# EAGLE board merge4 (EAGLE 6.6.0)
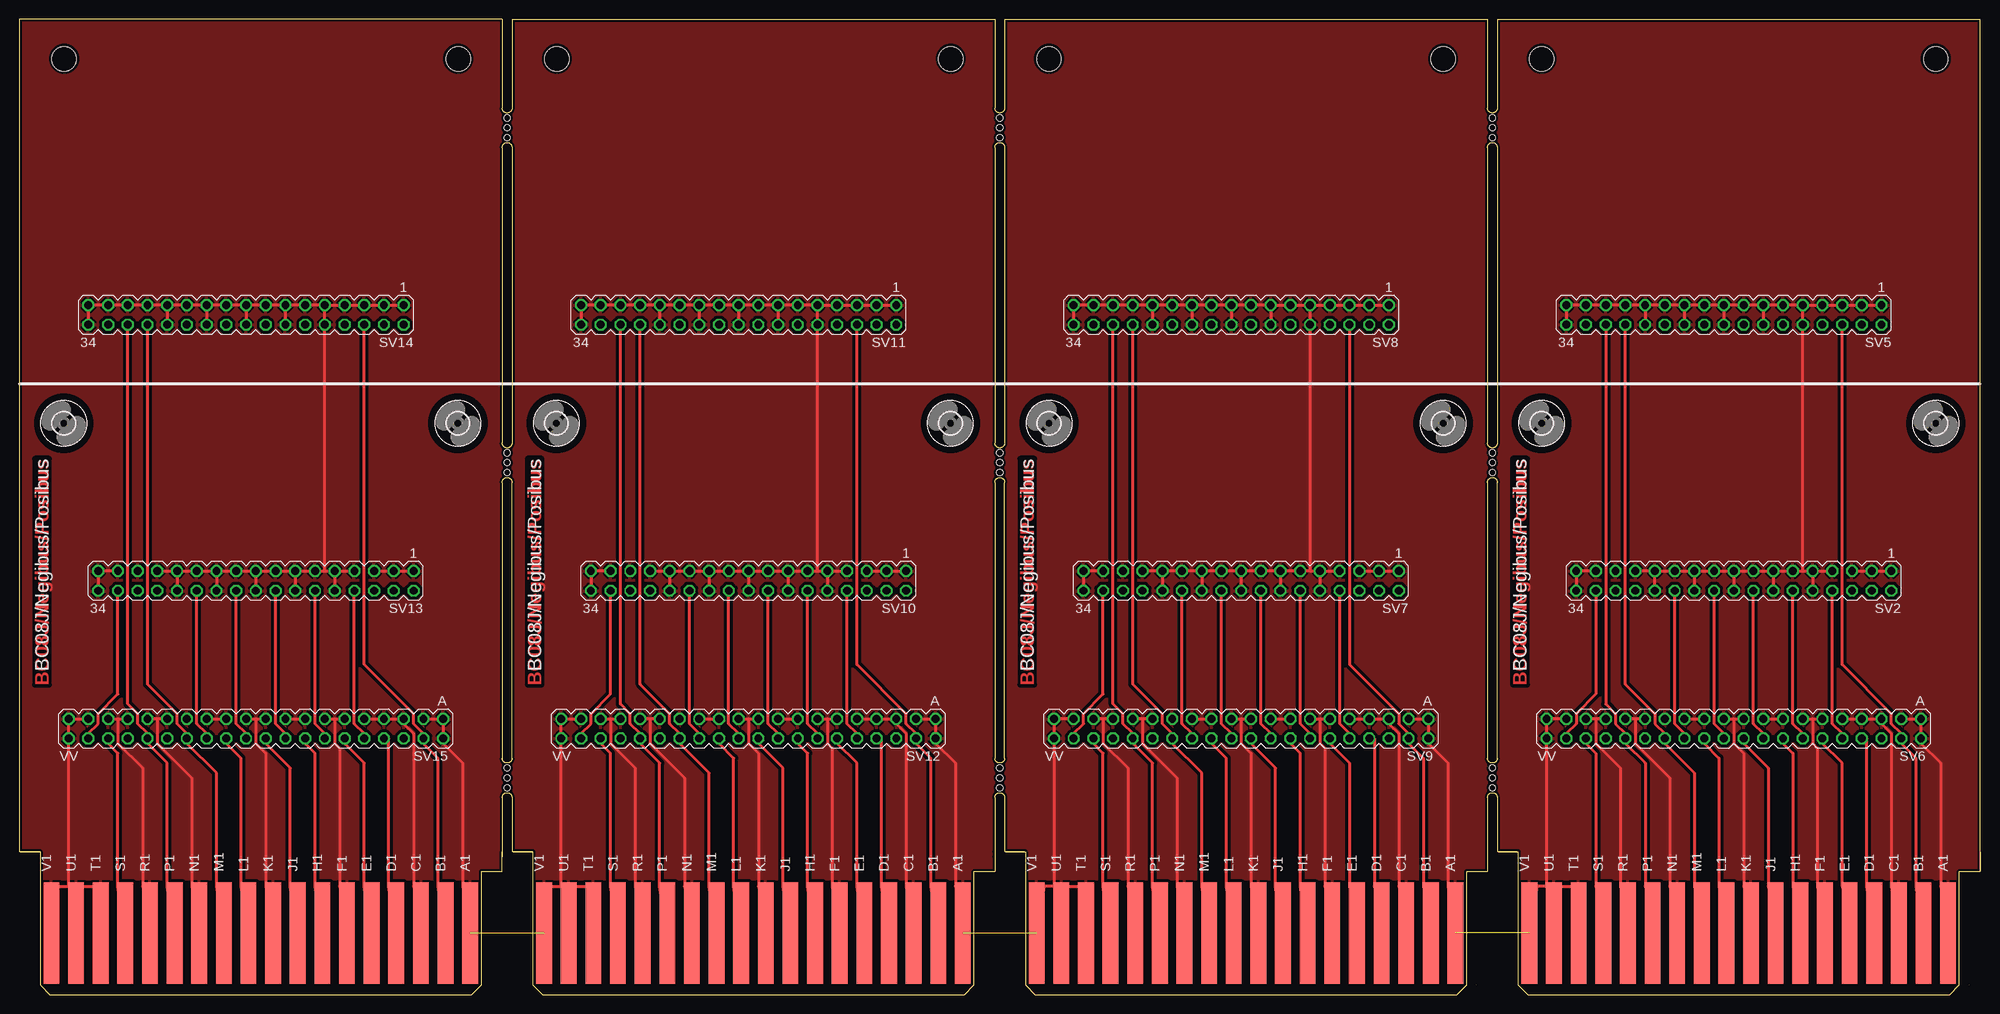
[diagram p0: board, top side]
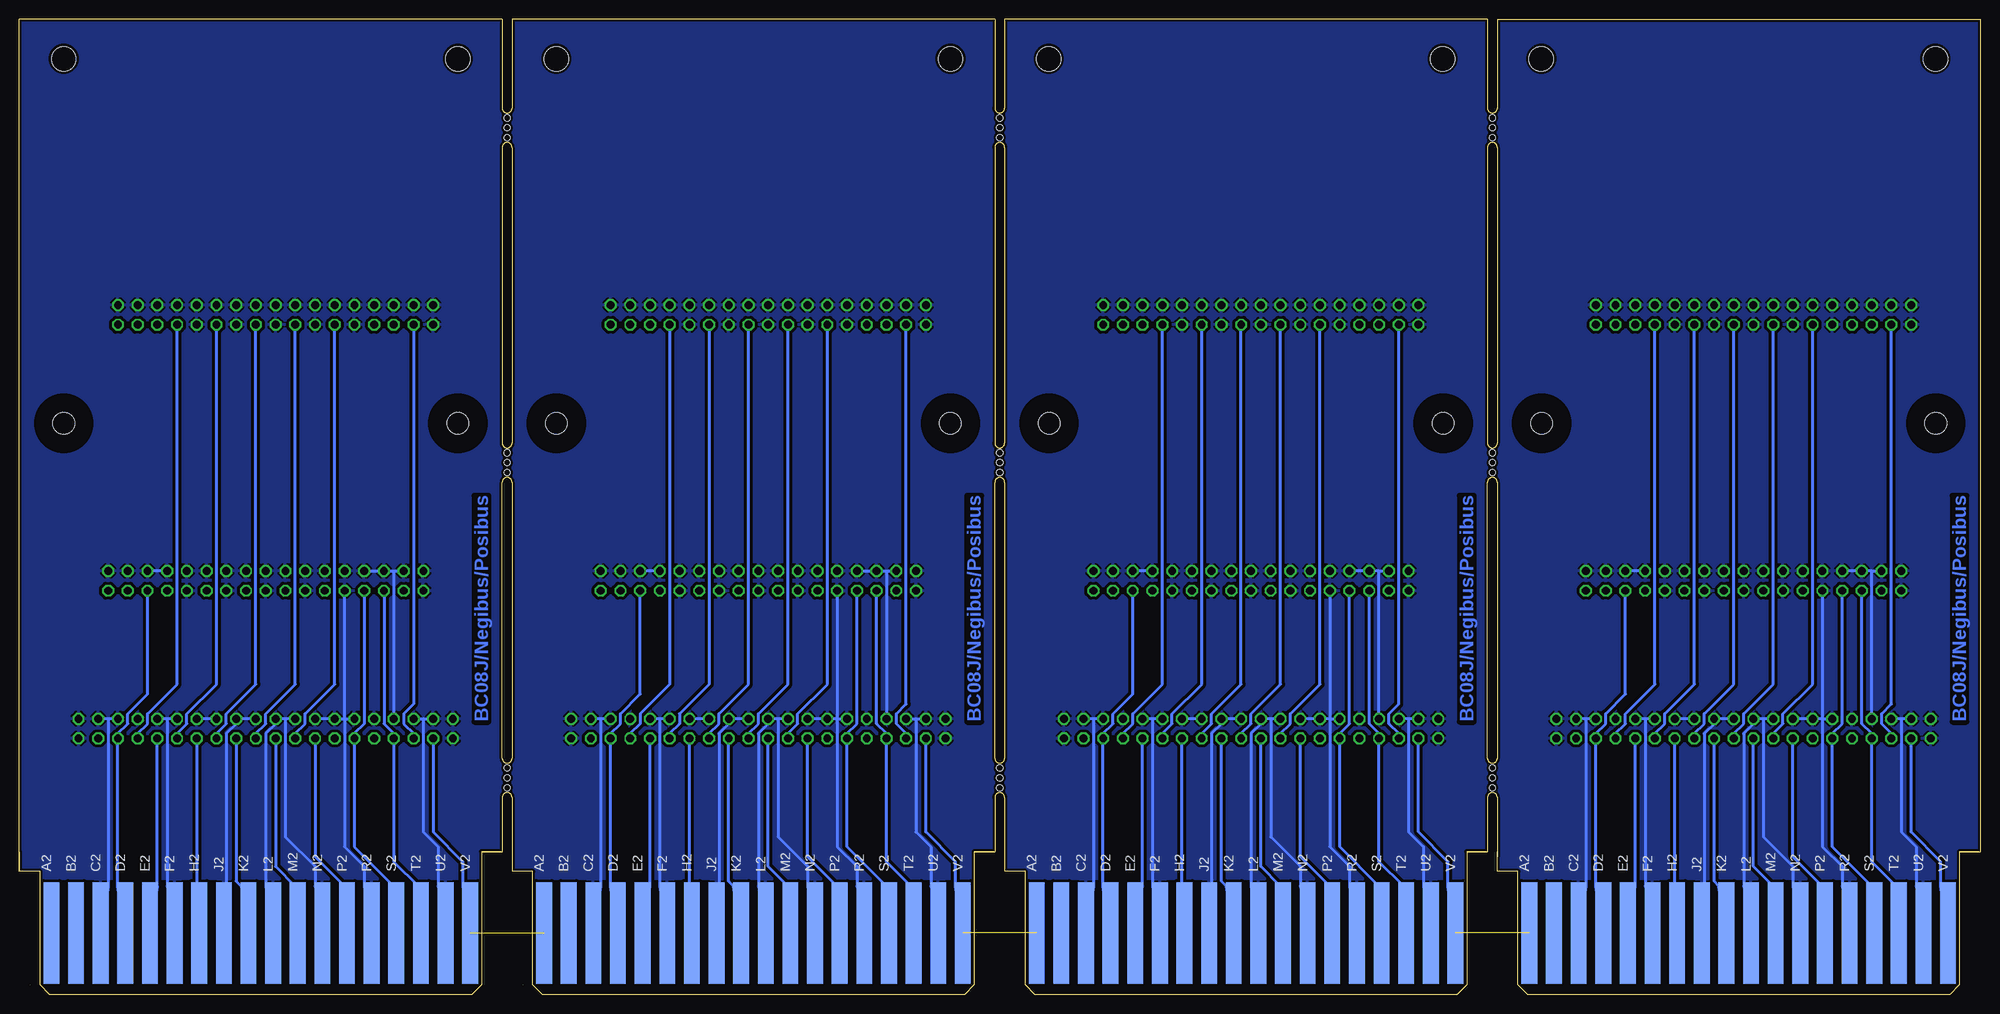
[diagram p1: board, bottom side, seen from below]

Size 252.73 x 125.73 mm. Coordinates in mm from the lower left corner, seen from the top.
Copper layers (1*16): Top 0.035mm / dielectric 1.5mm / Bottom 0.035mm
Design rules "15mils": minimum track width 15mil, minimum drill 24mil, track to track 15mil, track to pad 10mil, pad to pad 10mil, via to via 10mil, smd to smd 10mil, copper to edge 13mil, drill to drill 10mil, minimum pad ring 10mil, minimum via ring 8mil, stop-mask expansion 0mil, vias tented up to drill 0mil, thermal gap 10mil

## Footprints (pad centres in the part's own frame; a part is rotated, then mirrored left to right if it is on the bottom)
MA17-2 = drill 1.016 octagon: 1 -20.32,-1.27; 2 -20.32,1.27; 3 -17.78,-1.27; 4 -17.78,1.27; 5 -15.24,-1.27; 6 -15.24,1.27; 7 -12.7,-1.27; 8 -12.7,1.27; 9 -10.16,-1.27; 10 -10.16,1.27; 11 -7.62,-1.27; 12 -7.62,1.27; 13 -5.08,-1.27; 14 -5.08,1.27; 15 -2.54,-1.27; 16 -2.54,1.27; 17 0,-1.27; 18 0,1.27; 19 2.54,-1.27; 20 2.54,1.27; 21 5.08,-1.27; 22 5.08,1.27; 23 7.62,-1.27; 24 7.62,1.27; 25 10.16,-1.27; 26 10.16,1.27; 27 12.7,-1.27; 28 12.7,1.27; 29 15.24,-1.27; 30 15.24,1.27; 31 17.78,-1.27; 32 17.78,1.27; 33 20.32,-1.27; 34 20.32,1.27
DEC40PIN = drill 1.016 octagon: A -24.13,-1.27; AA 3.81,-1.27; B -24.13,1.27; BB 3.81,1.27; C -21.59,-1.27; CC 6.35,-1.27; D -21.59,1.27; DD 6.35,1.27; E -19.05,-1.27; EE 8.89,-1.27; F -19.05,1.27; FF 8.89,1.27; H -16.51,-1.27; HH 11.43,-1.27; J -16.51,1.27; JJ 11.43,1.27; K -13.97,-1.27; KK 13.97,-1.27; L -13.97,1.27; LL 13.97,1.27; M -11.43,-1.27; MM 16.51,-1.27; N -11.43,1.27; NN 16.51,1.27; P -8.89,-1.27; PP 19.05,-1.27; R -8.89,1.27; RR 19.05,1.27; S -6.35,-1.27; SS 21.59,-1.27; T -6.35,1.27; TT 21.59,1.27; U -3.81,-1.27; UU 24.13,-1.27; V -3.81,1.27; VV 24.13,1.27; W -1.27,-1.27; X -1.27,1.27; Y 1.27,-1.27; Z 1.27,1.27
DECPROTO1111 = hole 3.175: 183.515,120.65; 132.715,120.65; 69.266,120.65; 120.066,120.65; 56.566,120.65; 5.766,120.65; 247.015,120.65; 196.215,120.65 | hole 0.813: 62.865,69.85; 62.865,68.58; 62.865,67.31; 62.865,26.67; 62.865,27.94; 62.865,29.21; 62.865,113.03; 62.865,110.49; 62.865,111.76; 126.365,69.85; 126.365,68.58; 126.365,67.31; 126.365,26.67; 126.365,27.94; 126.365,29.21; 126.365,113.03; 126.365,110.49; 126.365,111.76; 189.865,26.67; 189.865,27.94; 189.865,29.21; 189.865,67.31; 189.865,68.58; 189.865,69.85; 189.865,110.49; 189.865,111.76; 189.865,113.03
EDGE-CON2 = smd 13.106 x 2.032: A1 7.938,4.128; B1 7.938,7.303; C1 7.938,10.477; D1 7.938,13.652; E1 7.938,16.828; F1 7.938,20.003; H1 7.938,23.177; J1 7.938,26.352; K1 7.938,29.527; L1 7.938,32.703; M1 7.938,35.877; N1 7.938,39.053; P1 7.938,42.227; R1 7.938,45.403; S1 7.938,48.578; T1 7.938,51.752; U1 7.938,54.928; V1 7.938,58.102 | smd 13.106 x 2.032 bottom: A2 7.938,4.128; B2 7.938,7.303; C2 7.938,10.477; D2 7.938,13.652; E2 7.938,16.828; F2 7.938,20.003; H2 7.938,23.177; J2 7.938,26.352; K2 7.938,29.527; L2 7.938,32.703; M2 7.938,35.877; N2 7.938,39.053; P2 7.938,42.227; R2 7.938,45.403; S2 7.938,48.578; T2 7.938,51.752; U2 7.938,54.928; V2 7.938,58.102
2,8 = hole 2.8: 0,0

## Placement (x,y rotation side)
SV2  [MA17-2]  220.98,53.34 180 top
SV5  [MA17-2]  219.71,87.63 180 top
SV6  [DEC40PIN]  220.98,34.29 180 top
SV7  [MA17-2]  157.48,53.34 180 top
SV8  [MA17-2]  156.21,87.63 180 top
SV9  [DEC40PIN]  157.48,34.29 180 top
SV10  [MA17-2]  93.98,53.34 180 top
SV11  [MA17-2]  92.71,87.63 180 top
SV12  [DEC40PIN]  93.98,34.29 180 top
SV13  [MA17-2]  30.48,53.34 180 top
SV14  [MA17-2]  29.21,87.63 180 top
SV15  [DEC40PIN]  30.48,34.29 180 top
U$5  DECPROTO  [DECPROTO1111]  0,0 0 top
U$6  [EDGE-CON2]  252.73,0 90 top
U$8  [2,8]  247.01,73.66 270 top
U$9  [2,8]  196.22,73.66 270 top
U$10  [EDGE-CON2]  189.23,0 90 top
U$12  [2,8]  183.51,73.66 270 top
U$13  [2,8]  132.72,73.66 270 top
U$14  [EDGE-CON2]  125.73,0 90 top
U$16  [2,8]  120.02,73.66 270 top
U$17  [2,8]  69.22,73.66 270 top
U$18  [EDGE-CON2]  62.23,0 90 top
U$20  [2,8]  56.52,73.66 270 top
U$21  [2,8]  5.71,73.66 270 top

## Library data of the parts
SV2 SV5 SV7 SV8 SV10 SV11 SV13 SV14 = con-lstb
SV6 SV9 SV12 SV15 U$5 U$6 U$10 U$14 U$18 = dec-con
U$8 U$9 U$12 U$13 U$16 U$17 U$20 U$21 = holes

## Nets
-15V1: U$6.B2
-15V2: U$10.B2
-15V3: U$14.B2
-15V4: U$18.B2
B2: SV5.6 SV6.D U$6.B1
B3: SV8.6 SV9.D U$10.B1
B4: SV11.6 SV12.D U$14.B1
B5: SV14.6 SV15.D U$18.B1
D3: SV2.6 SV6.F U$6.D2
D4: SV5.8 SV6.J U$6.D1
D5: SV7.6 SV9.F U$10.D2
D6: SV8.8 SV9.J U$10.D1
D7: SV10.6 SV12.F U$14.D2
D8: SV11.8 SV12.J U$14.D1
D9: SV13.6 SV15.F U$18.D2
D10: SV14.8 SV15.J U$18.D1
E3: SV2.8 SV6.L U$6.E2
E4: SV5.12 SV6.N U$6.E1
E5: SV7.8 SV9.L U$10.E2
E6: SV8.12 SV9.N U$10.E1
E7: SV10.8 SV12.L U$14.E2
E8: SV11.12 SV12.N U$14.E1
E9: SV13.8 SV15.L U$18.E2
E10: SV14.12 SV15.N U$18.E1
GND: SV2.1 SV2.3 SV2.5 SV2.7 SV2.9 SV2.10 SV2.11 SV2.13 SV2.14 SV2.15 SV2.17 SV2.18 SV2.19 SV2.21 SV2.22 SV2.23 SV2.25 SV2.26 SV2.27 SV2.29 SV2.31 SV2.33 SV2.34 SV5.1 SV5.3 SV5.5 SV5.7 SV5.9 SV5.10 SV5.11 SV5.13 SV5.14 SV5.15 SV5.17 SV5.18 SV5.19 SV5.21 SV5.22 SV5.23 SV5.25 SV5.26 SV5.27 SV5.29 SV5.31 SV5.33 SV5.34 SV6.A SV6.AA SV6.B SV6.C SV6.CC SV6.E SV6.EE SV6.H SV6.HH SV6.K SV6.KK SV6.M SV6.MM SV6.P SV6.PP SV6.S SV6.SS SV6.U SV6.UU SV6.VV SV6.W SV6.Y SV7.1 SV7.3 SV7.5 SV7.7 SV7.9 SV7.10 SV7.11 SV7.13 SV7.14 SV7.15 SV7.17 SV7.18 SV7.19 SV7.21 SV7.22 SV7.23 SV7.25 SV7.26 SV7.27 SV7.29 SV7.31 SV7.33 SV7.34 SV8.1 SV8.3 SV8.5 SV8.7 SV8.9 SV8.10 SV8.11 SV8.13 SV8.14 SV8.15 SV8.17 SV8.18 SV8.19 SV8.21 SV8.22 SV8.23 SV8.25 SV8.26 SV8.27 SV8.29 SV8.31 SV8.33 SV8.34 SV9.A SV9.AA SV9.B SV9.C SV9.CC SV9.E SV9.EE SV9.H SV9.HH SV9.K SV9.KK SV9.M SV9.MM SV9.P SV9.PP SV9.S SV9.SS SV9.U SV9.UU SV9.VV SV9.W SV9.Y SV10.1 SV10.3 SV10.5 SV10.7 SV10.9 SV10.10 SV10.11 SV10.13 SV10.14 SV10.15 SV10.17 SV10.18 SV10.19 SV10.21 SV10.22 SV10.23 SV10.25 SV10.26 SV10.27 SV10.29 SV10.31 SV10.33 SV10.34 SV11.1 SV11.3 SV11.5 SV11.7 SV11.9 SV11.10 SV11.11 SV11.13 SV11.14 SV11.15 SV11.17 SV11.18 SV11.19 SV11.21 SV11.22 SV11.23 SV11.25 SV11.26 SV11.27 SV11.29 SV11.31 SV11.33 SV11.34 SV12.A SV12.AA SV12.B SV12.C SV12.CC SV12.E SV12.EE SV12.H SV12.HH SV12.K SV12.KK SV12.M SV12.MM SV12.P SV12.PP SV12.S SV12.SS SV12.U SV12.UU SV12.VV SV12.W SV12.Y SV13.1 SV13.3 SV13.5 SV13.7 SV13.9 SV13.10 SV13.11 SV13.13 SV13.14 SV13.15 SV13.17 SV13.18 SV13.19 SV13.21 SV13.22 SV13.23 SV13.25 SV13.26 SV13.27 SV13.29 SV13.31 SV13.33 SV13.34 SV14.1 SV14.3 SV14.5 SV14.7 SV14.9 SV14.10 SV14.11 SV14.13 SV14.14 SV14.15 SV14.17 SV14.18 SV14.19 SV14.21 SV14.22 SV14.23 SV14.25 SV14.26 SV14.27 SV14.29 SV14.31 SV14.33 SV14.34 SV15.A SV15.AA SV15.B SV15.C SV15.CC SV15.E SV15.EE SV15.H SV15.HH SV15.K SV15.KK SV15.M SV15.MM SV15.P SV15.PP SV15.S SV15.SS SV15.U SV15.UU SV15.VV SV15.W SV15.Y U$6.A1 U$6.C1 U$6.C2 U$6.F1 U$6.F2 U$6.J2 U$6.K1 U$6.L2 U$6.N1 U$6.N2 U$6.R1 U$6.R2 U$6.T1 U$6.U1 U$6.U2 U$6.V1 U$10.A1 U$10.C1 U$10.C2 U$10.F1 U$10.F2 U$10.J2 U$10.K1 U$10.L2 U$10.N1 U$10.N2 U$10.R1 U$10.R2 U$10.T1 U$10.U1 U$10.U2 U$10.V1 U$14.A1 U$14.C1 U$14.C2 U$14.F1 U$14.F2 U$14.J2 U$14.K1 U$14.L2 U$14.N1 U$14.N2 U$14.R1 U$14.R2 U$14.T1 U$14.U1 U$14.U2 U$14.V1 U$18.A1 U$18.C1 U$18.C2 U$18.F1 U$18.F2 U$18.J2 U$18.K1 U$18.L2 U$18.N1 U$18.N2 U$18.R1 U$18.R2 U$18.T1 U$18.U1 U$18.U2 U$18.V1
H3: SV2.12 SV6.R U$6.H2
H4: SV5.16 SV6.T U$6.H1
H5: SV7.12 SV9.R U$10.H2
H6: SV8.16 SV9.T U$10.H1
H7: SV10.12 SV12.R U$14.H2
H8: SV11.16 SV12.T U$14.H1
H9: SV13.12 SV15.R U$18.H2
H10: SV14.16 SV15.T U$18.H1
J2: SV5.20 SV6.X U$6.J1
J3: SV8.20 SV9.X U$10.J1
J4: SV11.20 SV12.X U$14.J1
J5: SV14.20 SV15.X U$18.J1
K1: SV2.16 SV6.V U$6.K2
K3: SV7.16 SV9.V U$10.K2
K4: SV10.16 SV12.V U$14.K2
K5: SV13.16 SV15.V U$18.K2
L2: SV5.24 SV6.BB U$6.L1
L3: SV8.24 SV9.BB U$10.L1
L4: SV11.24 SV12.BB U$14.L1
L5: SV14.24 SV15.BB U$18.L1
M3: SV2.20 SV6.Z U$6.M2
M4: SV5.28 SV6.FF U$6.M1
M5: SV7.20 SV9.Z U$10.M2
M6: SV8.28 SV9.FF U$10.M1
M7: SV10.20 SV12.Z U$14.M2
M8: SV11.28 SV12.FF U$14.M1
M9: SV13.20 SV15.Z U$18.M2
M10: SV14.28 SV15.FF U$18.M1
P3: SV2.24 SV6.DD U$6.P2
P4: SV5.30 SV6.LL U$6.P1
P5: SV7.24 SV9.DD U$10.P2
P6: SV8.30 SV9.LL U$10.P1
P7: SV10.24 SV12.DD U$14.P2
P8: SV11.30 SV12.LL U$14.P1
P9: SV13.24 SV15.DD U$18.P2
P10: SV14.30 SV15.LL U$18.P1
S3: SV2.28 SV6.JJ U$6.S2
S4: SV5.32 SV6.RR U$6.S1
S5: SV7.28 SV9.JJ U$10.S2
S6: SV8.32 SV9.RR U$10.S1
S7: SV10.28 SV12.JJ U$14.S2
S8: SV11.32 SV12.RR U$14.S1
S9: SV13.28 SV15.JJ U$18.S2
S10: SV14.32 SV15.RR U$18.S1
T1: SV2.30 SV6.NN U$6.T2
T3: SV7.30 SV9.NN U$10.T2
T4: SV10.30 SV12.NN U$14.T2
T5: SV13.30 SV15.NN U$18.T2
V1: SV2.32 SV6.TT U$6.V2
V3: SV7.32 SV9.TT U$10.V2
V4: SV10.32 SV12.TT U$14.V2
V5: SV13.32 SV15.TT U$18.V2
VCC1: U$6.A2
VCC2: U$10.A2
VCC3: U$14.A2
VCC4: U$18.A2

## Tracks (layer width: path | path; a pad name or v marks a point on that pad's centre or on a via)
B2
  Top 0.381: SV5.6 234.95,42.55 241.3,36.2 241.3,34.93 242.57,33.66 SV6.D 242.57,32.39 244.47,30.48 244.47,13.97 U$6.B1
B3
  Top 0.381: SV8.6 171.45,42.55 177.8,36.2 177.8,34.93 179.07,33.66 SV9.D 179.07,32.39 180.97,30.48 180.97,13.97 U$10.B1
B4
  Top 0.381: SV11.6 107.95,42.55 114.3,36.2 114.3,34.93 115.57,33.66 SV12.D 115.57,32.39 117.47,30.48 117.47,13.97 U$14.B1
B5
  Top 0.381: SV14.6 44.45,85.73 44.45,42.55 50.8,36.2 50.8,34.93 52.07,33.66 SV15.D 52.07,32.39 53.98,30.48 53.98,13.97 U$18.B1
D3
  Bottom 0.381: SV2.6 236.22,38.74 238.76,36.2 238.76,34.93 240.03,33.66 SV6.F 240.03,13.97 U$6.D2
D4
  Top 0.381: U$6.D1 238.12,13.97 238.12,33.02 SV6.J
  Bottom 0.381: SV5.8 232.41,40.01 236.22,36.2 236.22,34.93 237.49,33.66 SV6.J
D5
  Bottom 0.381: SV7.6 172.72,38.74 175.26,36.2 175.26,34.93 176.53,33.66 SV9.F 176.53,13.97 U$10.D2
D6
  Top 0.381: U$10.D1 174.62,13.97 174.62,33.02 SV9.J
  Bottom 0.381: SV8.8 168.91,40.01 172.72,36.2 172.72,34.93 173.99,33.66 SV9.J
D7
  Bottom 0.381: SV10.6 109.22,38.74 111.76,36.2 111.76,34.93 113.03,33.66 SV12.F 113.03,13.97 U$14.D2
D8
  Top 0.381: U$14.D1 111.12,13.97 111.12,33.02 SV12.J
  Bottom 0.381: SV11.8 105.41,40.01 109.22,36.2 109.22,34.93 110.49,33.66 SV12.J
D9
  Bottom 0.381: SV13.6 45.72,51.44 45.72,38.74 48.26,36.2 48.26,34.93 49.53,33.66 SV15.F 49.53,32.39 49.53,13.97 U$18.D2
D10
  Top 0.381: U$18.D1 47.62,13.97 47.62,33.02 SV15.J
  Bottom 0.381: SV14.8 41.91,85.73 41.91,40.01 45.72,36.2 45.72,34.93 46.99,33.66 SV15.J
E3
  Top 0.381: SV2.8 233.68,34.93 234.95,33.66 SV6.L
  Bottom 0.381: SV6.L 234.95,13.97 U$6.E2
E4
  Top 0.381: U$6.E1 234.95,13.97 234.95,29.85 232.41,32.39 SV6.N
  Bottom 0.381: SV5.12 227.33,40.01 231.14,36.2 231.14,34.93 232.41,33.66 SV6.N
E5
  Top 0.381: SV7.8 170.18,34.93 171.45,33.66 SV9.L
  Bottom 0.381: SV9.L 171.45,13.97 U$10.E2
E6
  Top 0.381: U$10.E1 171.45,13.97 171.45,29.85 168.91,32.39 SV9.N
  Bottom 0.381: SV8.12 163.83,40.01 167.64,36.2 167.64,34.93 168.91,33.66 SV9.N
E7
  Top 0.381: SV10.8 106.68,34.93 107.95,33.66 SV12.L
  Bottom 0.381: SV12.L 107.95,13.97 U$14.E2
E8
  Top 0.381: U$14.E1 107.95,13.97 107.95,29.85 105.41,32.39 SV12.N
  Bottom 0.381: SV11.12 100.33,40.01 104.14,36.2 104.14,34.93 105.41,33.66 SV12.N
E9
  Top 0.381: SV13.8 43.18,51.44 43.18,34.93 44.45,33.66 SV15.L
  Bottom 0.381: SV15.L 44.45,32.39 44.45,13.97 U$18.E2
E10
  Top 0.381: U$18.E1 44.45,13.97 44.45,29.85 41.91,32.39 SV15.N
  Bottom 0.381: SV14.12 36.83,85.73 36.83,40.01 40.64,36.2 40.64,34.93 41.91,33.66 SV15.N
GND  (3 unrouted)
  Top 0.381: 17.78,35.56 SV15.KK | SV15.HH 17.78,35.56 | SV15.CC SV15.AA | 30.48,35.56 SV15.W | SV15.Y 30.48,35.56 | SV15.U SV15.S | 40.64,35.56 SV15.M | SV15.P 40.64,35.56 | SV15.K SV15.H SV15.E 49.53,34.93 50.8,33.66 50.8,13.97 U$18.C1 | SV15.C SV15.A SV15.B 54.61,32.39 57.15,29.85 57.15,13.97 U$18.A1 | 17.78,35.56 17.78,32.39 22.23,27.94 22.23,13.97 U$18.N1 | 30.48,35.56 30.48,32.39 31.75,31.12 31.75,13.97 U$18.K1 | 40.64,35.56 40.64,32.39 41.27,31.75 41.27,13.97 U$18.F1 | SV14.34 SV14.33 SV14.31 SV14.29 SV14.27 SV14.25 | SV14.25 SV14.26 | SV14.25 SV14.23 SV14.21 | SV14.21 SV14.22 | SV14.21 SV14.19 SV14.17 | SV14.17 SV14.18 | SV14.17 SV14.15 SV14.13 | SV14.13 SV14.14 | SV14.13 SV14.11 SV14.9 | SV14.9 SV14.10 39.37,54.61 | SV14.9 SV14.7 SV14.5 SV14.3 SV14.1 | 6.35,13.97 5.08,13.97 U$18.V1 | U$18.T1 9.53,13.97 8.26,13.97 U$18.U1 6.35,13.97 | SV15.SS SV15.UU SV15.VV 6.35,13.97 | 12.7,35.56 SV15.MM | SV15.PP 12.7,35.56 | SV13.34 SV13.33 SV13.31 | SV13.27 SV13.25 | SV13.25 SV13.23 SV13.21 | SV13.25 SV13.26 | SV13.21 SV13.22 | SV13.21 SV13.19 SV13.17 | SV13.17 SV13.15 SV13.13 | SV13.17 SV13.18 | SV13.13 SV13.14 | SV13.13 SV13.11 39.37,54.61 | 39.37,54.61 SV13.9 | SV13.9 SV13.10 | SV13.9 SV13.7 | SV13.5 SV13.3 SV13.1 | 12.7,35.56 12.7,32.39 15.88,29.21 15.88,13.97 U$18.R1 | 81.28,35.56 SV12.KK | SV12.HH 81.28,35.56 | SV12.CC SV12.AA | 93.98,35.56 SV12.W | SV12.Y 93.98,35.56 | SV12.U SV12.S | 104.14,35.56 SV12.M | SV12.P 104.14,35.56 | SV12.K SV12.H SV12.E 113.03,34.93 114.3,33.66 114.3,13.97 U$14.C1 | SV12.C SV12.A SV12.B 118.11,32.39 120.65,29.85 120.65,13.97 U$14.A1 | 81.28,35.56 81.28,32.39 85.72,27.94 85.72,13.97 U$14.N1 | 93.98,35.56 93.98,32.39 95.25,31.12 95.25,13.97 U$14.K1
  Top 0.381: 104.14,35.56 104.14,32.39 104.78,31.75 104.78,13.97 U$14.F1 | SV11.34 SV11.33 SV11.31 SV11.29 SV11.27 SV11.25 | SV11.25 SV11.26 | SV11.25 SV11.23 SV11.21 | SV11.21 SV11.22 | SV11.21 SV11.19 SV11.17 | SV11.17 SV11.18 | SV11.17 SV11.15 SV11.13 | SV11.13 SV11.14 | SV11.13 SV11.11 SV11.9 | SV11.9 SV11.10 102.87,54.61 | SV11.9 SV11.7 SV11.5 SV11.3 SV11.1 | 69.85,13.97 68.58,13.97 U$14.V1 | U$14.T1 73.03,13.97 71.75,13.97 U$14.U1 69.85,13.97 | SV12.SS SV12.UU SV12.VV 69.85,13.97 | 76.2,35.56 SV12.MM | SV12.PP 76.2,35.56 | SV10.34 SV10.33 SV10.31 | SV10.27 SV10.25 | SV10.25 SV10.23 SV10.21 | SV10.25 SV10.26 | SV10.21 SV10.22 | SV10.21 SV10.19 SV10.17 | SV10.17 SV10.15 SV10.13 | SV10.17 SV10.18 | SV10.13 SV10.14 | SV10.13 SV10.11 102.87,54.61 | 102.87,54.61 SV10.9 | SV10.9 SV10.10 | SV10.9 SV10.7 | SV10.5 SV10.3 SV10.1 | 76.2,35.56 76.2,32.39 79.38,29.21 79.38,13.97 U$14.R1 | 144.78,35.56 SV9.KK | SV9.HH 144.78,35.56 | SV9.CC SV9.AA | 157.48,35.56 SV9.W | SV9.Y 157.48,35.56 | SV9.U SV9.S | 167.64,35.56 SV9.M | SV9.P 167.64,35.56 | SV9.K SV9.H SV9.E 176.53,34.93 177.8,33.66 177.8,13.97 U$10.C1 | SV9.C SV9.A SV9.B 181.61,32.39 184.15,29.85 184.15,13.97 U$10.A1 | 144.78,35.56 144.78,32.39 149.22,27.94 149.22,13.97 U$10.N1 | 157.48,35.56 157.48,32.39 158.75,31.12 158.75,13.97 U$10.K1 | 167.64,35.56 167.64,32.39 168.28,31.75 168.28,13.97 U$10.F1 | SV8.34 SV8.33 SV8.31 SV8.29 SV8.27 SV8.25 | SV8.25 SV8.26 | SV8.25 SV8.23 SV8.21 | SV8.21 SV8.22 | SV8.21 SV8.19 SV8.17 | SV8.17 SV8.18 | SV8.17 SV8.15 SV8.13 | SV8.13 SV8.14 | SV8.13 SV8.11 SV8.9 | SV8.9 SV8.10 166.37,54.61 | SV8.9 SV8.7 SV8.5 SV8.3 SV8.1 | 133.35,13.97 132.08,13.97 U$10.V1 | U$10.T1 136.53,13.97 135.25,13.97 U$10.U1 133.35,13.97
  Top 0.381: SV9.SS SV9.UU SV9.VV 133.35,13.97 | SV9.MM 139.7,35.56 | 139.7,35.56 SV9.PP | SV7.34 SV7.33 SV7.31 | SV7.25 SV7.27 | SV7.25 SV7.23 SV7.21 | SV7.25 SV7.26 | SV7.21 SV7.22 | SV7.21 SV7.19 SV7.17 | SV7.17 SV7.15 SV7.13 | SV7.17 SV7.18 | SV7.13 SV7.14 | SV7.13 SV7.11 166.37,54.61 | 166.37,54.61 SV7.9 | SV7.9 SV7.10 | SV7.9 SV7.7 | SV7.5 SV7.3 SV7.1 | 139.7,35.56 139.7,32.39 142.88,29.21 142.88,13.97 U$10.R1 | 208.28,35.56 SV6.KK | SV6.HH 208.28,35.56 | SV6.CC SV6.AA | 220.98,35.56 SV6.W | SV6.Y 220.98,35.56 | SV6.U SV6.S | 231.14,35.56 SV6.M | SV6.P 231.14,35.56 | SV6.K SV6.H SV6.E 240.03,34.93 241.3,33.66 241.3,13.97 U$6.C1 | SV6.C SV6.A SV6.B 245.11,32.39 247.65,29.85 247.65,13.97 U$6.A1 | 208.28,35.56 208.28,32.39 212.72,27.94 212.72,13.97 U$6.N1 | 220.98,35.56 220.98,32.39 222.25,31.12 222.25,13.97 U$6.K1 | 231.14,35.56 231.14,32.39 231.78,31.75 231.78,13.97 U$6.F1 | SV5.34 SV5.33 SV5.31 SV5.29 SV5.27 SV5.25 | SV5.25 SV5.26 | SV5.25 SV5.23 SV5.21 | SV5.21 SV5.22 | SV5.21 SV5.19 SV5.17 | SV5.17 SV5.18 | SV5.17 SV5.15 SV5.13 | SV5.13 SV5.14 | SV5.13 SV5.11 SV5.9 | SV5.9 SV5.10 229.87,54.61 | SV5.9 SV5.7 SV5.5 SV5.3 SV5.1 | 196.85,13.97 195.58,13.97 U$6.V1 | U$6.T1 200.03,13.97 198.75,13.97 U$6.U1 196.85,13.97 | SV6.SS SV6.UU SV6.VV 196.85,13.97 | SV6.MM 203.2,35.56 | 203.2,35.56 SV6.PP | SV2.34 SV2.33 SV2.31 | SV2.25 SV2.27 | SV2.25 SV2.23 SV2.21 | SV2.26 SV2.25 | SV2.21 SV2.22 | SV2.21 SV2.19 SV2.17 | SV2.17 SV2.15 SV2.13 | SV2.17 SV2.18 | SV2.13 SV2.14 | SV2.13 SV2.11 229.87,54.61 | 229.87,54.61 SV2.9 | SV2.9 SV2.10 | SV2.9 SV2.7 | SV2.5 SV2.3 SV2.1 | 203.2,35.56 203.2,32.39 206.38,29.21 206.38,13.97 U$6.R1
  Bottom 0.381: 20.32,35.56 SV15.EE SV15.CC | 20.32,35.56 SV15.HH | 27.94,35.56 SV15.Y 29.21,34.93 30.48,33.66 30.48,13.97 U$18.L2 | SV15.AA 27.94,35.56 | SV15.W SV15.U 34.29,34.93 35.56,33.66 35.56,13.97 U$18.J2 | SV15.S SV15.P | 43.18,35.56 SV15.K | SV15.M 43.18,35.56 | 50.8,35.56 SV15.C | SV15.E 50.8,35.56 | 20.32,35.56 20.32,19.05 17.78,16.51 17.78,13.97 U$18.R1 | 27.94,35.56 27.94,20.32 24.13,16.51 24.13,13.97 U$18.N1 | 43.18,35.56 43.18,13.97 U$18.F1 | 50.8,35.56 50.8,13.97 U$18.C1 | 10.16,35.56 SV15.PP | SV15.SS 10.16,35.56 | 13.97,54.61 SV13.29 SV13.27 | 13.97,54.61 SV13.31 | SV13.7 SV13.5 | SV15.MM 13.97,54.61 | SV13.26 20.32,35.56 | 10.16,35.56 10.16,20.96 8.26,19.05 8.26,13.97 U$18.U1 | 83.82,35.56 SV12.EE SV12.CC | 83.82,35.56 SV12.HH | 91.44,35.56 SV12.Y 92.71,34.93 93.98,33.66 93.98,13.97 U$14.L2 | SV12.AA 91.44,35.56 | SV12.W SV12.U 97.79,34.93 99.06,33.66 99.06,13.97 U$14.J2 | SV12.S SV12.P | 106.68,35.56 SV12.K | SV12.M 106.68,35.56 | 114.3,35.56 SV12.C | SV12.E 114.3,35.56 | 83.82,35.56 83.82,19.05 81.28,16.51 81.28,13.97 U$14.R1 | 91.44,35.56 91.44,20.32 87.63,16.51 87.63,13.97 U$14.N1 | 106.68,35.56 106.68,13.97 U$14.F1 | 114.3,35.56 114.3,13.97 U$14.C1 | 73.66,35.56 SV12.PP | SV12.SS 73.66,35.56 | 77.47,54.61 SV10.29 SV10.27 | 77.47,54.61 SV10.31 | SV10.7 SV10.5 | SV12.MM 77.47,54.61 | SV10.26 83.82,35.56 | 73.66,35.56 73.66,20.96 71.75,19.05 71.75,13.97 U$14.U1 | 147.32,35.56 SV9.EE SV9.CC | 147.32,35.56 SV9.HH | 154.94,35.56 SV9.Y 156.21,34.93 157.48,33.66 157.48,13.97 U$10.L2 | SV9.AA 154.94,35.56 | SV9.W SV9.U 161.29,34.93 162.56,33.66 162.56,13.97 U$10.J2 | SV9.S SV9.P | 170.18,35.56 SV9.K | SV9.M 170.18,35.56 | 177.8,35.56 SV9.C
  Bottom 0.381: SV9.E 177.8,35.56 | 147.32,35.56 147.32,19.05 144.78,16.51 144.78,13.97 U$10.R1 | 154.94,35.56 154.94,20.32 151.13,16.51 151.13,13.97 U$10.N1 | 170.18,35.56 170.18,13.97 U$10.F1 | 177.8,35.56 177.8,13.97 U$10.C1 | SV9.PP 137.16,35.56 | 137.16,35.56 SV9.SS | 140.97,54.61 SV7.29 SV7.27 | 140.97,54.61 SV7.31 | SV7.7 SV7.5 | 140.97,54.61 SV9.MM | SV7.26 147.32,35.56 | 137.16,35.56 137.16,20.96 135.25,19.05 135.25,13.97 U$10.U1 | 210.82,35.56 SV6.EE SV6.CC | 210.82,35.56 SV6.HH | 218.44,35.56 SV6.Y 219.71,34.93 220.98,33.66 220.98,13.97 U$6.L2 | SV6.AA 218.44,35.56 | SV6.W SV6.U 224.79,34.93 226.06,33.66 226.06,13.97 U$6.J2 | SV6.S SV6.P | 233.68,35.56 SV6.K | SV6.M 233.68,35.56 | 241.3,35.56 SV6.C | SV6.E 241.3,35.56 | 210.82,35.56 210.82,19.05 208.28,16.51 208.28,13.97 U$6.R1 | 218.44,35.56 218.44,20.32 214.63,16.51 214.63,13.97 U$6.N1 | 233.68,35.56 233.68,13.97 U$6.F1 | 241.3,35.56 241.3,13.97 U$6.C1 | SV6.PP 200.66,35.56 | 200.66,35.56 SV6.SS | 204.47,54.61 SV2.29 SV2.27 | 204.47,54.61 SV2.31 | SV2.7 SV2.5 | 204.47,54.61 SV6.MM | 210.82,35.56 SV2.26 | 200.66,35.56 200.66,20.96 198.75,19.05 198.75,13.97 U$6.U1
  pour Bottom (isolate 0.254): 252.73,125.73 252.73,13.97 0,13.97 0,125.73
  pour Top (isolate 0.254): 252.73,13.97 252.73,125.73 0,125.73 0,13.97
H3
  Top 0.381: SV2.12 228.6,34.93 229.87,33.66 SV6.R
  Bottom 0.381: SV6.R 229.87,13.97 U$6.H2
H4
  Top 0.381: U$6.H1 228.6,13.97 228.6,31.12 227.33,32.39 SV6.T
  Bottom 0.381: SV5.16 222.25,40.01 226.06,36.2 226.06,34.93 227.33,33.66 SV6.T
H5
  Top 0.381: SV7.12 165.1,34.93 166.37,33.66 SV9.R
  Bottom 0.381: SV9.R 166.37,13.97 U$10.H2
H6
  Top 0.381: U$10.H1 165.1,13.97 165.1,31.12 163.83,32.39 SV9.T
  Bottom 0.381: SV8.16 158.75,40.01 162.56,36.2 162.56,34.93 163.83,33.66 SV9.T
H7
  Top 0.381: SV10.12 101.6,34.93 102.87,33.66 SV12.R
  Bottom 0.381: SV12.R 102.87,13.97 U$14.H2
H8
  Top 0.381: U$14.H1 101.6,13.97 101.6,31.12 100.33,32.39 SV12.T
  Bottom 0.381: SV11.16 95.25,40.01 99.06,36.2 99.06,34.93 100.33,33.66 SV12.T
H9
  Top 0.381: SV13.12 38.1,51.44 38.1,34.93 39.37,33.66 SV15.R
  Bottom 0.381: SV15.R 39.37,32.39 39.37,13.97 U$18.H2
H10
  Top 0.381: U$18.H1 38.1,13.97 38.1,31.12 36.83,32.39 SV15.T
  Bottom 0.381: SV14.16 31.75,85.73 31.75,40.01 35.56,36.2 35.56,34.93 36.83,33.66 SV15.T
J2
  Top 0.381: U$6.J1 225.43,13.97 225.43,29.21 222.25,32.39 SV6.X
  Bottom 0.381: SV5.20 217.17,40.01 220.98,36.2 220.98,34.93 222.25,33.66 SV6.X
J3
  Top 0.381: U$10.J1 161.93,13.97 161.93,29.21 158.75,32.39 SV9.X
  Bottom 0.381: SV8.20 153.67,40.01 157.48,36.2 157.48,34.93 158.75,33.66 SV9.X
J4
  Top 0.381: U$14.J1 98.42,13.97 98.42,29.21 95.25,32.39 SV12.X
  Bottom 0.381: SV11.20 90.17,40.01 93.98,36.2 93.98,34.93 95.25,33.66 SV12.X
J5
  Top 0.381: U$18.J1 34.92,13.97 34.92,29.21 31.75,32.39 SV15.X
  Bottom 0.381: SV14.20 26.67,85.73 26.67,40.01 30.48,36.2 30.48,34.93 31.75,33.66 SV15.X
K1
  Top 0.381: SV2.16 223.52,34.93 224.79,33.66 SV6.V
  Bottom 0.381: SV6.V 224.79,14.61 224.16,13.97 U$6.K2
K3
  Top 0.381: SV7.16 160.02,34.93 161.29,33.66 SV9.V
  Bottom 0.381: SV9.V 161.29,14.61 160.66,13.97 U$10.K2
K4
  Top 0.381: SV10.16 96.52,34.93 97.79,33.66 SV12.V
  Bottom 0.381: SV12.V 97.79,14.61 97.16,13.97 U$14.K2
K5
  Top 0.381: SV13.16 33.02,51.44 33.02,34.93 34.29,33.66 SV15.V
  Bottom 0.381: SV15.V 34.29,32.39 34.29,14.61 33.66,13.97 U$18.K2
L2
  Top 0.381: U$6.L1 219.07,13.97 219.07,30.48 217.17,32.39 SV6.BB
  Bottom 0.381: SV5.24 212.09,40.01 215.9,36.2 215.9,34.93 217.17,33.66 SV6.BB
L3
  Top 0.381: U$10.L1 155.57,13.97 155.57,30.48 153.67,32.39 SV9.BB
  Bottom 0.381: SV8.24 148.59,40.01 152.4,36.2 152.4,34.93 153.67,33.66 SV9.BB
L4
  Top 0.381: U$14.L1 92.08,13.97 92.08,30.48 90.17,32.39 SV12.BB
  Bottom 0.381: SV11.24 85.09,40.01 88.9,36.2 88.9,34.93 90.17,33.66 SV12.BB
L5
  Top 0.381: U$18.L1 28.57,13.97 28.57,30.48 26.67,32.39 SV15.BB
  Bottom 0.381: SV14.24 21.59,85.73 21.59,40.01 25.4,36.2 25.4,34.93 26.67,33.66 SV15.BB
M3
  Top 0.381: SV2.20 218.44,34.93 219.71,33.66 SV6.Z
  Bottom 0.381: SV6.Z 219.71,16.51 217.17,13.97 U$6.M2
M4
  Top 0.381: SV5.28 207.01,40.01 210.82,36.2 210.82,34.93 212.09,33.66 SV6.FF 212.09,32.39 215.9,28.58 215.9,13.97 U$6.M1
M5
  Top 0.381: SV7.20 154.94,34.93 156.21,33.66 SV9.Z
  Bottom 0.381: SV9.Z 156.21,16.51 153.67,13.97 U$10.M2
M6
  Top 0.381: SV8.28 143.51,40.01 147.32,36.2 147.32,34.93 148.59,33.66 SV9.FF 148.59,32.39 152.4,28.58 152.4,13.97 U$10.M1
M7
  Top 0.381: SV10.20 91.44,34.93 92.71,33.66 SV12.Z
  Bottom 0.381: SV12.Z 92.71,16.51 90.17,13.97 U$14.M2
M8
  Top 0.381: SV11.28 80.01,40.01 83.82,36.2 83.82,34.93 85.09,33.66 SV12.FF 85.09,32.39 88.9,28.58 88.9,13.97 U$14.M1
M9
  Top 0.381: SV13.20 27.94,51.44 27.94,34.93 29.21,33.66 SV15.Z
  Bottom 0.381: SV15.Z 29.21,32.39 29.21,16.51 26.67,13.97 U$18.M2
M10
  Top 0.381: SV14.28 16.51,85.73 16.51,40.01 20.32,36.2 20.32,34.93 21.59,33.66 SV15.FF 21.59,32.39 25.4,28.58 25.4,13.97 U$18.M1
P3
  Top 0.381: SV2.24 213.36,34.93 214.63,33.66 SV6.DD
  Bottom 0.381: SV6.DD 214.63,17.78 210.82,13.97 U$6.P2
P4
  Top 0.381: SV5.30 204.47,37.47 205.74,36.2 205.74,34.93 207.01,33.66 SV6.LL 207.01,32.39 209.55,29.85 209.55,13.97 U$6.P1
P5
  Top 0.381: SV7.24 149.86,34.93 151.13,33.66 SV9.DD
  Bottom 0.381: SV9.DD 151.13,17.78 147.32,13.97 U$10.P2
P6
  Top 0.381: SV8.30 140.97,37.47 142.24,36.2 142.24,34.93 143.51,33.66 SV9.LL 143.51,32.39 146.05,29.85 146.05,13.97 U$10.P1
P7
  Top 0.381: SV10.24 86.36,34.93 87.63,33.66 SV12.DD
  Bottom 0.381: SV12.DD 87.63,17.78 83.82,13.97 U$14.P2
P8
  Top 0.381: SV11.30 77.47,37.47 78.74,36.2 78.74,34.93 80.01,33.66 SV12.LL 80.01,32.39 82.55,29.85 82.55,13.97 U$14.P1
P9
  Top 0.381: SV13.24 22.86,51.44 22.86,34.93 24.13,33.66 SV15.DD
  Bottom 0.381: SV15.DD 24.13,32.39 24.13,17.78 20.32,13.97 U$18.P2
P10
  Top 0.381: SV14.30 13.97,85.73 13.97,37.47 15.24,36.2 15.24,34.93 16.51,33.66 SV15.LL 16.51,32.39 19.05,29.85 19.05,13.97 U$18.P1
S3
  Bottom 0.381: SV2.28 208.28,34.93 209.55,33.66 SV6.JJ 209.55,19.05 204.47,13.97 U$6.S2
S4
  Top 0.381: U$6.S1 203.2,13.97 203.2,31.12 201.93,32.39 SV6.RR
  Bottom 0.381: SV5.32 201.93,37.47 203.2,36.2 203.2,34.93 201.93,33.66 SV6.RR
S5
  Bottom 0.381: SV7.28 144.78,34.93 146.05,33.66 SV9.JJ 146.05,19.05 140.97,13.97 U$10.S2
S6
  Top 0.381: U$10.S1 139.7,13.97 139.7,31.12 138.43,32.39 SV9.RR
  Bottom 0.381: SV8.32 138.43,37.47 139.7,36.2 139.7,34.93 138.43,33.66 SV9.RR
S7
  Bottom 0.381: SV10.28 81.28,34.93 82.55,33.66 SV12.JJ 82.55,19.05 77.47,13.97 U$14.S2
S8
  Top 0.381: U$14.S1 76.2,13.97 76.2,31.12 74.93,32.39 SV12.RR
  Bottom 0.381: SV11.32 74.93,37.47 76.2,36.2 76.2,34.93 74.93,33.66 SV12.RR
S9
  Bottom 0.381: SV13.28 17.78,51.44 17.78,34.93 19.05,33.66 SV15.JJ 19.05,32.39 19.05,19.05 13.97,13.97 U$18.S2
S10
  Top 0.381: U$18.S1 12.7,13.97 12.7,31.12 11.43,32.39 SV15.RR
  Bottom 0.381: SV14.32 11.43,85.73 11.43,37.47 12.7,36.2 12.7,34.93 11.43,33.66 SV15.RR
T1
  Bottom 0.381: SV2.30 205.74,34.93 204.47,33.66 SV6.NN 204.47,17.15 201.29,13.97 U$6.T2
T3
  Bottom 0.381: SV7.30 142.24,34.93 140.97,33.66 SV9.NN 140.97,17.15 137.79,13.97 U$10.T2
T4
  Bottom 0.381: SV10.30 78.74,34.93 77.47,33.66 SV12.NN 77.47,17.15 74.3,13.97 U$14.T2
T5
  Bottom 0.381: SV13.30 15.24,51.44 15.24,34.93 13.97,33.66 SV15.NN 13.97,32.39 13.97,17.15 10.79,13.97 U$18.T2
V1
  Top 0.381: SV2.32 203.2,38.74 200.66,36.2 200.66,34.93 199.39,33.66 SV6.TT
  Bottom 0.381: SV6.TT 199.39,20.96 195.58,17.15 195.58,13.97 U$6.V2
V3
  Top 0.381: SV7.32 139.7,38.74 137.16,36.2 137.16,34.93 135.89,33.66 SV9.TT
  Bottom 0.381: SV9.TT 135.89,20.96 132.08,17.15 132.08,13.97 U$10.V2
V4
  Top 0.381: SV10.32 76.2,38.74 73.66,36.2 73.66,34.93 72.39,33.66 SV12.TT
  Bottom 0.381: SV12.TT 72.39,20.96 68.58,17.15 68.58,13.97 U$14.V2
V5
  Top 0.381: SV13.32 12.7,51.44 12.7,38.74 10.16,36.2 10.16,34.93 8.89,33.66 SV15.TT
  Bottom 0.381: SV15.TT 8.89,32.39 8.89,20.96 5.08,17.15 5.08,13.97 U$18.V2

## Text on the board
Top: BC08J/Negibus/Posibus | BC08J/Negibus/Posibus | BC08J/Negibus/Posibus | BC08J/Negibus/Posibus
Bottom: BC08J/Negibus/Posibus | BC08J/Negibus/Posibus | BC08J/Negibus/Posibus | BC08J/Negibus/Posibus
tPlace: BC08J/Negibus/Posibus | BC08J/Negibus/Posibus | BC08J/Negibus/Posibus | BC08J/Negibus/Posibus
tValues: * | * | * | * | * | * | * | * | * | * | * | * | * | * | * | * | * | * | * | * | * | * | * | * | * | * | * | * | * | * | * | * | * | * | * | * | Side 1 | Side 1 | Side 1 | Side 1 | * | * | * | * | * | * | * | * | * | * | * | * | * | * | * | * | * | * | * | * | * | * | * | * | * | * | * | * | * | * | * | * | * | * | * | * | Side 2 | Side 2 | Side 2 | Side 2 | * | * | * | * | * | * | * | * | * | * | * | * | * | * | * | * | * | * | * | * | * | * | * | * | * | * | * | * | * | * | * | * | * | * | * | * | * | * | * | * | * | * | * | * | * | * | * | * | * | * | * | * | * | * | * | * | * | * | * | * | * | * | * | * | * | * | * | * | * | * | * | * | BC08J | BC08J | BC08J | BC08J